# EAGLE board Pulse Earing (EAGLE 6.4)
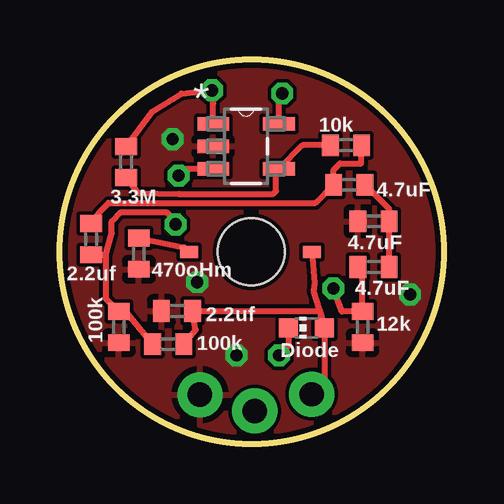
[diagram p0: board, top side]
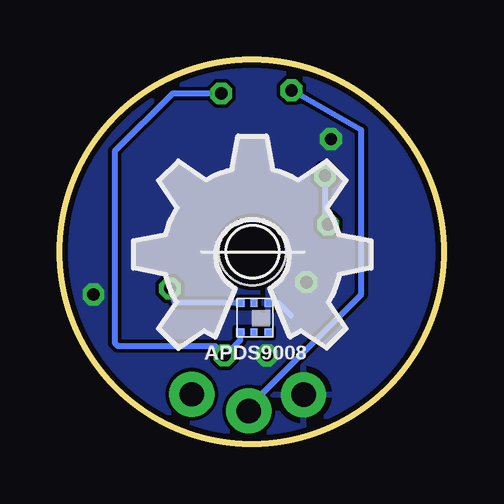
[diagram p1: board, bottom side, seen from below]

Size 16 x 16 mm. Coordinates in mm from the lower left corner, seen from the top.
Outline: circle at 8,8 radius 8
Copper layers (1*16): Top 0.035mm / dielectric 1.5mm / Bottom 0.035mm
Design rules "default": minimum track width 8mil, minimum drill 24mil, track to track 6mil, track to pad 6mil, pad to pad 6mil, via to via 6mil, smd to smd 6mil, copper to edge 8mil, drill to drill 8mil, minimum pad ring 10mil, minimum via ring 8mil, stop-mask expansion 4mil, vias tented up to drill 0mil, thermal gap 10mil

## Footprints (pad centres in the part's own frame; a part is rotated, then mirrored left to right if it is on the bottom)
1X01NS = drill 1.016 pad 1.88: 1 0,0
C0402 = smd 0.7 x 0.9: 1 -0.65,0; 2 0.65,0
CHIP-LED0603 = smd 0.8 x 0.8: A 0,-0.75; C 0,0.75
R0402 = smd 0.7 x 0.9: 1 -0.65,0; 2 0.65,0
SOT95P270X145-5N = smd 1.321 x 0.559: 1 -1.372,0.94; 2 -1.372,0; 3 -1.372,-0.94; 4 1.372,-0.94; 5 1.372,0.94
APDS9008 = smd 0.35 x 0.35: GND 0.18,-1.42; NCC1 0.18,-0.18; OUT 1.36,-1.42; VCC 1.36,-0.18 | smd 0.3 x 0.35: NC 0.78,-1.42; NCC 0.78,-0.18
KBREVMNTLED = smd 0.75 x 0.5 bottom: GND 5.144,0; V+ 0,0 | hole 2.794: 2.54,0

## Placement (x,y rotation side)
+V  M01SMDNS  [1X01NS]  10.5,2.05 0 top
C1  2.2uf  [C0402]  4.88,5.53 180 top
C2  4.7uf  [C0402]  13.08,7.37 0 top
C3  4.7uf  [C0402]  12.06,10.79 180 top
C4  2.2uf  [C0402]  1.3,8.52 270 top
C5  4.7uf  [C0402]  13.08,9.27 180 top
GND  M01SMDNS  [1X01NS]  5.84,2.04 0 top
LED1  [CHIP-LED0603]  10.29,4.83 90 top
OUT  M01SMDNS  [1X01NS]  8.12,1.36 0 top
R1  10k  [R0402]  11.94,12.45 180 top
R2  100k  [R0402]  4.51,4.14 0 top
R3  100k  [R0402]  2.46,4.86 90 top
R4  12k  [R0402]  12.62,4.86 90 top
R5  470  [R0402]  3.29,7.92 90 top
R6  3.3m  [R0402]  2.76,11.74 90 top
U$1  MCP6001UT-E/OT  [SOT95P270X145-5N]  7.76,12.4 0 top
U$2  APDS9008  [APDS9008]  7.12,4.45 180 bottom
U$3  KBREVMTNLED  [KBREVMNTLED]  10.52,8 0 bottom
U$4  [OSHW_FILLX350_NOTEXT]  12.93,3.96 0 bottom

## Library data of the parts
+V GND OUT = SparkFun
C1-C5 R1-R6 = resistor
LED1 = led
U$1 = untitled; MPN: MCP6001UT-E/OT; OC_FARNELL: 1840893; OC_NEWARK: 84R5183; PACKAGE: SOT23-5; SUPPLIER: Microchip
U$2 U$3 = untitled
U$4 = ohw-logo

## Nets
+V: +V.1 C1.1 LED1.A R2.2 U$3.V+
GND: C1.2 C5.2 GND.1 R3.1 R4.1 R5.1 U$1.2 U$2.GND
N$1: LED1.C U$1.5 U$2.VCC
N$2: R1.2 R6.1 U$1.4
N$3: C2.1 R4.2 U$2.OUT
N$4: C2.2 C3.1 C5.1
N$5: C3.2 C4.1 R1.1
N$6: C4.2 R2.1 R3.2 U$1.3
N$7: R5.2 U$3.GND
OUT: OUT.1 R6.2 U$1.1

## Tracks (layer width: path | path; a pad name or v marks a point on that pad's centre or on a via)
+V
  Top 0.254: U$3.V+ 10.62,6.7 10.57,6.34 10.8,5.62 | 10.8,5.62 10.88,5.36 LED1.A 11.04,2.59 +V.1 | R2.2 5.66,4.75 C1.1 10.71,5.53 10.8,5.62
GND  (via drill 0.51)
  Bottom 0.254: U$2.GND 6.89,5.87 6.35,5.33
  other vias: 4.7,12.7 14.6,6.22 7.36,3.68 5.71,6.73
  pour Top: -1.51,12.3 -1.51,18.3 17.49,18.3 17.49,14.8 17.49,-1.2 -1.51,-1.2
  pour Bottom: -1.51,-1.2 -1.51,18.3 17.49,18.3 17.49,-1.2
N$1  (via drill 0.51)
  Top 0.254: v9.14,3.68 9.54,4.08 LED1.C | U$1.5 9.13,14.47 v9.27,14.6
  Bottom 0.254: U$2.VCC 8.48,4.31 8.99,3.8 9.02,3.8 v9.14,3.68 9.52,4.06 13.59,4.06 13.71,4.19 13.71,12.19 11.3,14.6 v9.27,14.6
N$2
  Top 0.254: R1.2 10.12,12.45 U$1.4 9.02,11.34 9.02,10.54 8.89,10.41 4.95,10.41 3.27,10.45 R6.1
N$3  (via drill 0.51)
  Top 0.254: C2.1 12.62,7.18 R4.2 11.76,5.51 v11.4,6.47
  Bottom 0.254: U$2.OUT 11.21,5.87 v11.4,6.47
N$4
  Top 0.254: C2.2 C5.1 13.73,9.78 C3.1
N$5
  Top 0.254: R1.1 12.57,12.43 12.57,11.68 11.68,11.68 11.41,11.41 C3.2 10.65,10.03 2.03,10.03 1.68,9.69 C4.1
N$6  (via drill 0.51)
  Top 0.254: C4.2 1.9,7.87 | 1.9,7.87 2.16,8.76 2.16,9.27 2.54,9.65 4.44,9.65 4.7,9.4 4.7,9.27 v4.82,9.14 | 1.9,7.87 1.9,6.06 R3.2 2.74,5.51 R2.1 | U$1.3 5.18,11.46 v4.95,11.18
  Bottom 0.254: v4.95,11.18 4.95,9.27 v4.82,9.14
N$7
  Top 0.254: R5.2 5.19,8.19 U$3.GND
OUT  (via drill 0.51)
  Top 0.254: R6.2 3.84,13.84 5.07,14.6 v6.35,14.73 6.39,14.18 U$1.1
  Bottom 0.254: OUT.1 7.59,2.06 3.43,6.22 3.43,13.08 v6.35,14.73

## Text on the board
_tsilk: 10k | 3.3M | 4.7uF | 4.7uF | 2.2uf | 470oHm | 4.7uF | 4.7uF | 2.2uf | 100k | 100k | 12k | Diode
_bsilk: APDS9008